# EAGLE board CT_schematic (EAGLE 7.6.0)

Size 100 x 80 mm. Coordinates in mm from the lower left corner, seen from the top.
Outline: 0,0 100,0 100,80 0,80 0,0
Copper layers (1*16): Top 0.035mm / dielectric 1.5mm / Bottom 0.035mm
Design rules "default": minimum track width 10mil, minimum drill 24mil, track to track 8mil, track to pad 8mil, pad to pad 8mil, via to via 8mil, smd to smd 8mil, copper to edge 40mil, drill to drill 8mil, minimum pad ring 10mil, minimum via ring 8mil, stop-mask expansion 4mil, vias tented up to drill 0mil, thermal gap 10mil

## Footprints (pad centres in the part's own frame; a part is rotated, then mirrored left to right if it is on the bottom)
C0603 = smd 0.8 x 0.8: 1 -0.762,0; 2 0.762,0
C0402 = smd 0.5 x 0.5: 1 -0.508,0; 2 0.508,0
C0805 = smd 1.2 x 1.3: 1 -1.016,0; 2 1.016,0
C1210 = smd 1.2 x 2.5: 1 -1.524,0; 2 1.524,0
EXV-9H = smd 3.505 x 1.676: 1 -2.857,0; 2 2.857,0
L0603 = smd 0.8 x 0.8: 1 -0.762,0; 2 0.762,0
PJ-037B_PACKAGE = drill 3.7 square: 1 12,0 | drill 3.2 square: 2 6,0
R0603 = smd 0.8 x 0.8: 1 -0.762,0; 2 0.762,0
LQFP144 = smd 0.35 x 1.35: 1 -8.75,-10.625; 2 -8.25,-10.625; 3 -7.75,-10.625; 4 -7.25,-10.625; 5 -6.75,-10.625; 6 -6.25,-10.625; 7 -5.75,-10.625; 8 -5.25,-10.625; 9 -4.75,-10.625; 10 -4.25,-10.625; 11 -3.75,-10.625; 12 -3.25,-10.625; 13 -2.75,-10.62; 14 -2.25,-10.625; 15 -1.75,-10.625; 16 -1.25,-10.625; 17 -0.75,-10.625; 18 -0.25,-10.625; 19 0.25,-10.625; 20 0.75,-10.625; 21 1.25,-10.625; 22 1.75,-10.625; 23 2.25,-10.625; 24 2.75,-10.62; 25 3.25,-10.625; 26 3.75,-10.625; 27 4.25,-10.625; 28 4.75,-10.625; 29 5.25,-10.625; 30 5.75,-10.625; 31 6.25,-10.625; 32 6.75,-10.625; 33 7.25,-10.625; 34 7.75,-10.625; 35 8.25,-10.625; 36 8.75,-10.625; 73 8.75,10.625; 74 8.25,10.625; 75 7.75,10.625; 76 7.25,10.625; 77 6.75,10.625; 78 6.25,10.625; 79 5.75,10.625; 80 5.25,10.625; 81 4.75,10.625; 82 4.25,10.625; 83 3.75,10.625; 84 3.25,10.625; 85 2.75,10.625; 86 2.25,10.625; 87 1.75,10.625; 88 1.25,10.625; 89 0.75,10.625; 90 0.25,10.625; 91 -0.25,10.625; 92 -0.75,10.625; 93 -1.25,10.625; 94 -1.75,10.625; 95 -2.25,10.625; 96 -2.75,10.625; 97 -3.25,10.625; 98 -3.75,10.625; 99 -4.25,10.625; 100 -4.75,10.625; 101 -5.25,10.625; 102 -5.75,10.625; 103 -6.25,10.625; 104 -6.75,10.625; 105 -7.25,10.625; 106 -7.75,10.625; 107 -8.25,10.625; 108 -8.75,10.625 | smd 1.35 x 0.35: 37 10.625,-8.75; 38 10.625,-8.25; 39 10.625,-7.75; 40 10.625,-7.25; 41 10.625,-6.75; 42 10.625,-6.25; 43 10.625,-5.75; 44 10.625,-5.25; 45 10.625,-4.75; 46 10.625,-4.25; 47 10.625,-3.75; 48 10.625,-3.25; 49 10.625,-2.75; 50 10.625,-2.25; 51 10.625,-1.75; 52 10.625,-1.25; 53 10.625,-0.75; 54 10.625,-0.25; 55 10.625,0.25; 56 10.625,0.75; 57 10.625,1.25; 58 10.625,1.75; 59 10.625,2.25; 60 10.625,2.75; 61 10.625,3.25; 62 10.625,3.75; 63 10.625,4.25; 64 10.625,4.75; 65 10.625,5.25; 66 10.625,5.75; 67 10.625,6.25; 68 10.625,6.75; 69 10.625,7.25; 70 10.625,7.75; 71 10.625,8.25; 72 10.625,8.75; 109 -10.625,8.75; 110 -10.625,8.25; 111 -10.625,7.75; 112 -10.625,7.25; 113 -10.625,6.75; 114 -10.625,6.25; 115 -10.625,5.75; 116 -10.625,5.25; 117 -10.625,4.75; 118 -10.625,4.25; 119 -10.625,3.75; 120 -10.625,3.25; 121 -10.625,2.75; 122 -10.625,2.25; 123 -10.625,1.75; 124 -10.625,1.25; 125 -10.625,0.75; 126 -10.625,0.25; 127 -10.625,-0.25; 128 -10.625,-0.75; 129 -10.625,-1.25; 130 -10.625,-1.75; 131 -10.625,-2.25; 132 -10.625,-2.75; 133 -10.625,-3.25; 134 -10.625,-3.75; 135 -10.625,-4.25; 136 -10.625,-4.75; 137 -10.625,-5.25; 138 -10.625,-5.75; 139 -10.625,-6.25; 140 -10.625,-6.75; 141 -10.625,-7.25; 142 -10.625,-7.75; 143 -10.625,-8.25; 144 -10.625,-8.75
LGA14R35P5X6_200X200X100 = smd 0.35 x 0.15: 1 -0.8,0.525; 2 -0.8,0.175; 3 -0.8,-0.175; 4 -0.8,-0.525; 8 0.8,-0.525; 9 0.8,-0.175; 10 0.8,0.175; 11 0.8,0.525 | smd 0.15 x 0.35: 5 -0.35,-0.8; 6 0,-0.8; 7 0.35,-0.8; 12 0.35,0.8; 13 0,0.8; 14 -0.35,0.8
SSOP-28 = smd 1.5 x 0.4: 1 -3.625,4.225; 2 -3.625,3.575; 3 -3.625,2.925; 4 -3.625,2.275; 5 -3.625,1.625; 6 -3.625,0.975; 7 -3.625,0.325; 8 -3.625,-0.325; 9 -3.625,-0.975; 10 -3.625,-1.625; 11 -3.625,-2.275; 12 -3.625,-2.925; 13 -3.625,-3.575; 14 -3.625,-4.225; 15 3.625,-4.225; 16 3.625,-3.575; 17 3.625,-2.925; 18 3.625,-2.275; 19 3.625,-1.625; 20 3.625,-0.975; 21 3.625,-0.325; 22 3.625,0.325; 23 3.625,0.975; 24 3.625,1.625; 25 3.625,2.275; 26 3.625,2.925; 27 3.625,3.575; 28 3.625,4.225
FCI_10118193-0001LF = smd 0.4 x 1.35: 1 -1.3,2.675; 2 -0.65,2.675; 3 0,2.675; 4 0.65,2.675; 5 1.3,2.675 | smd 1.6 x 1.4: 6 -3.2,2.45; 7 3.2,2.45 | smd 1.9 x 1.9: 8 -1.2,0; 9 1.2,0 | hole 0.5: -3.3,0; 3.3,0
TST-110-05-T-D-RA = drill 1 pad 1.7 square: 1 0,0 | drill 1 pad 1.7: 2 0,2.54; 3 2.54,0; 4 2.54,2.54; 5 5.08,0; 6 5.08,2.54; 7 7.62,0; 8 7.62,2.54; 9 10.16,0; 10 10.16,2.54; 11 12.7,0; 12 12.7,2.54; 13 15.24,0; 14 15.24,2.54; 15 17.78,0; 16 17.78,2.54; 17 20.32,0; 18 20.32,2.54; 19 22.86,0; 20 22.86,2.54
TSSOP20-I = smd 0.4 x 1.35: 1 -2.925,-2.875; 2 -2.275,-2.875; 3 -1.625,-2.875; 4 -0.975,-2.875; 5 -0.325,-2.875; 6 0.325,-2.875; 7 0.975,-2.875; 8 1.625,-2.875; 9 2.275,-2.875; 10 2.925,-2.875; 11 2.925,2.875; 12 2.275,2.875; 13 1.625,2.875; 14 0.975,2.875; 15 0.325,2.875; 16 -0.325,2.875; 17 -0.975,2.875; 18 -1.625,2.875; 19 -2.275,2.875; 20 -2.925,2.875
182-009-MALE = drill 1.194 pad 1.524 octagon: 1 -5.537,10.923; 2 -2.769,10.923; 3 0,10.923; 4 2.769,10.923; 5 5.537,10.923; 6 -4.153,8.08; 7 -1.384,8.08; 8 1.384,8.08; 9 4.153,8.08 | hole 3.048: -12.446,9.501; 12.446,9.501
ABLS-25.000MHZ-B2F-T = smd 5.6 x 2.8: 1 -3.81,0; 2 5.69,0
ASEK = smd 1.4 x 1: 1 -1.1,-0.8; 2 1.1,-0.8; 3 1.1,0.8; 4 -1.1,0.8
ASFL1 = smd 1.7 x 1.5: 1 -1.27,-1.1; 2 1.27,-1.1; 3 1.27,1.1; 4 -1.27,1.1
WSON-8 = smd 0.3 x 0.6: 1 -0.75,0; 2 0.05,0; 3 0.85,0; 4 1.65,0; 5 1.65,3.8; 6 0.85,3.8; 7 0.05,3.8; 8 -0.75,3.8 | smd 3 x 2.6: PAD 0.45,1.9
SON-6 = smd 0.55 x 0.3: 1 -0.355,0.5 | smd 0.52 x 0.3: 2 -0.37,0; 3 -0.37,-0.5; 4 0.37,-0.5; 5 0.37,0; 6 0.37,0.5
SW_4-1437565-2 = smd 1.4 x 2.1: 1 -2.23,4.55; 2 -2.23,-4.55; 3 2.23,4.55; 4 2.23,-4.55
LGM67K-G1J2-24-Z = smd 0.8 x 1.4: A -2,0; C 0,0
NC7SZ125M5X = smd 1.3 x 0.7: 1 -1.3,0.95; 2 -1.3,0; 3 -1.3,-0.95; 4 1.3,-0.95; 5 1.3,0.95

## Placement (x,y rotation side)
C1  1e-06  [C0603]  -26.67,72.39 0 top  (outside the outline)
C2  1e-07  [C0603]  -30.48,72.39 0 top  (outside the outline)
C3  1e-07  [C0603]  -34.29,72.39 0 top  (outside the outline)
C4  1e-07  [C0603]  -38.1,72.39 0 top  (outside the outline)
C5  1e-07  [C0603]  -41.91,72.39 0 top  (outside the outline)
C6  1e-07  [C0603]  -45.72,72.39 0 top  (outside the outline)
C7  1e-07  [C0603]  -49.53,72.39 0 top  (outside the outline)
C8  1e-07  [C0603]  -53.34,72.39 0 top  (outside the outline)
C9  1e-07  [C0603]  -57.15,72.39 0 top  (outside the outline)
C10  1e-07  [C0603]  -60.96,72.39 0 top  (outside the outline)
C11  1e-07  [C0603]  -64.77,72.39 0 top  (outside the outline)
C12  1e-07  [C0603]  -68.58,72.39 0 top  (outside the outline)
C13  1e-07  [C0603]  -72.39,72.39 0 top  (outside the outline)
C14  4.7e-06  [C0603]  -15.24,72.39 0 top  (outside the outline)
C15  2.2e-06  [C0603]  -19.05,72.39 0 top  (outside the outline)
C16  2.2e-06  [C0603]  -22.86,72.39 0 top  (outside the outline)
C17  1e-08  [C0603]  -76.2,72.39 0 top  (outside the outline)
C18  1e-06  [C0603]  -80.01,72.39 0 top  (outside the outline)
C19  1e-11  [C0402]  -49.53,77.47 0 top  (outside the outline)
C20  1e-11  [C0402]  -53.34,77.47 0 top  (outside the outline)
C21  1e-07  [C0402]  -57.15,77.47 0 top  (outside the outline)
C22  1e-07  [C0402]  -60.96,77.47 0 top  (outside the outline)
C23  1e-07  [C0402]  -64.77,77.47 0 top  (outside the outline)
C24  4.7e-06  [C0805]  -27.94,66.04 0 top  (outside the outline)
C25  1e-07  [C0402]  -68.58,77.47 0 top  (outside the outline)
C26  1e-07  [C0402]  -72.39,77.47 0 top  (outside the outline)
C27  1e-07  [C0402]  -76.2,77.47 0 top  (outside the outline)
C28  1e-07  [C0402]  -80.01,77.47 0 top  (outside the outline)
C29  1e-07  [C0402]  -15.24,82.55 0 top  (outside the outline)
C30  1e-07  [C0402]  -19.05,82.55 0 top  (outside the outline)
C31  1e-07  [C0402]  -22.86,82.55 0 top  (outside the outline)
C32  1e-07  [C0402]  -26.67,82.55 0 top  (outside the outline)
C33  1e-07  [C0402]  -30.48,82.55 0 top  (outside the outline)
C34  1e-08  [C0402]  -34.29,82.55 0 top  (outside the outline)
C35  1e-08  [C0402]  -38.1,82.55 0 top  (outside the outline)
C36  1e-08  [C0402]  -41.91,82.55 0 top  (outside the outline)
C37  1e-05  [C1210]  -68.58,59.69 0 top  (outside the outline)
C38  1e-05  [C1210]  -74.93,59.69 0 top  (outside the outline)
C39  1e-07  [C0402]  -45.72,82.55 0 top  (outside the outline)
C40  0.0001  [EXV-9H]  -74.93,52.07 0 top  (outside the outline)
C41  0.0001  [EXV-9H]  -17.78,59.69 0 top  (outside the outline)
C42  1e-08  [C0402]  -49.53,82.55 0 top  (outside the outline)
C43  1e-08  [C0402]  -53.34,82.55 0 top  (outside the outline)
F1  240.0  [L0603]  -15.24,77.47 0 top  (outside the outline)
J1  PJ-037B  [PJ-037B_PACKAGE]  -40.64,30.48 0 top  (outside the outline)
R2  1000.0  [R0603]  -19.05,77.47 0 top  (outside the outline)
R4  4700.0  [R0603]  -22.86,77.47 0 top  (outside the outline)
R5  2200.0  [R0603]  -26.67,77.47 0 top  (outside the outline)
R6  2200.0  [R0603]  -30.48,77.47 0 top  (outside the outline)
R7  10000.0  [R0603]  -48.26,66.04 0 top  (outside the outline)
R8  10000.0  [R0603]  -53.34,66.04 0 top  (outside the outline)
R9  4700.0  [R0603]  -34.29,77.47 0 top  (outside the outline)
R10  10000.0  [R0603]  -58.42,66.04 0 top  (outside the outline)
R11  10000.0  [R0603]  -63.5,66.04 0 top  (outside the outline)
R12  10000.0  [R0603]  -68.58,66.04 0 top  (outside the outline)
R13  100000.0  [R0603]  -33.02,66.04 0 top  (outside the outline)
R14  2231.0  [R0603]  -38.1,77.47 0 top  (outside the outline)
R15  1000.0  [R0603]  -41.91,77.47 0 top  (outside the outline)
R16  10000.0  [R0603]  -73.66,66.04 0 top  (outside the outline)
R17  10000.0  [R0603]  -78.74,66.04 0 top  (outside the outline)
R18  9100.0  [R0603]  -45.72,77.47 0 top  (outside the outline)
R19  680000.0  [R0603]  -38.1,66.04 0 top  (outside the outline)
R20  120000.0  [R0603]  -43.18,66.04 0 top  (outside the outline)
U1  STM32F205ZFT6  [LQFP144]  -24.13,11.43 0 top  (outside the outline)
U2  BMC150  [LGA14R35P5X6_200X200X100]  -63.5,59.69 0 top  (outside the outline)
U3  FT232RL-REEL  [SSOP-28]  -20.32,30.48 0 top  (outside the outline)
U4  10118193-0001LF  [FCI_10118193-0001LF]  -55.88,41.91 0 top  (outside the outline)
U5  TST-110-05-T-D-RA  [TST-110-05-T-D-RA]  -46.99,49.53 0 top  (outside the outline)
U6  SP3203ECY-L/TR  [TSSOP20-I]  -72.39,29.21 0 top  (outside the outline)
U7  182-009-113R531  [182-009-MALE]  -59.69,6.35 0 top  (outside the outline)
U8  ABLS-25.000MHZ-B2F-T  [ABLS-25.000MHZ-B2F-T]  -36.83,59.69 0 top  (outside the outline)
U9  ASEK-32.768KHz-ECST  [ASEK]  -66.04,52.07 0 top  (outside the outline)
U10  ASFL1-12MHZ-NCS  [ASFL1]  -46.99,43.18 0 top  (outside the outline)
U11  LP3878SDX-ADJ/NOPB  [WSON-8]  -30.48,40.64 0 top  (outside the outline)
U12  TPS3895ADRYR  [SON-6]  -55.88,81.28 0 top  (outside the outline)
U13  4-1437565-2  [SW_4-1437565-2]  -57.15,29.21 0 top  (outside the outline)
U14  Q65110A2395  [LGM67K-G1J2-24-Z]  -48.26,59.69 0 top  (outside the outline)
U15  nc7sz125m5x  [NC7SZ125M5X]  -15.24,66.04 0 top  (outside the outline)
U16  nc7sz125m5x  [NC7SZ125M5X]  -21.59,66.04 0 top  (outside the outline)

## Library data of the parts
C1-C43 F1 J1 R2 R4-R20 U1-U16 = circuit_tree

## Nets
CLK_CRYSTAL_U1_23: C19.1 U1.23 U8.1
CLK_CRYSTAL_U1_24: C20.1 U1.24 U8.2
CLK_U1_8: U1.8 U9.3
CLK_U3_27: U3.27 U10.3
GND: C1.2 C2.2 C3.2 C4.2 C5.2 C6.2 C7.2 C8.2 C9.2 C10.2 C11.2 C12.2 C13.2 C14.2 C15.2 C16.2 C17.2 C18.2 C19.2 C20.2 C21.2 C22.2 C23.2 C24.2 C25.2 C26.2 C27.2 C28.2 C29.2 C32.2 C33.2 C34.2 C35.2 C36.2 C37.2 C38.2 C39.2 C40.2 C41.2 C42.2 C43.2 J1.2 R2.2 R7.2 R11.2 R15.2 R18.2 R20.2 U1.16 U1.31 U1.38 U1.51 U1.61 U1.83 U1.94 U1.107 U1.120 U1.130 U2.1 U2.6 U2.7 U2.9 U3.7 U3.18 U3.21 U3.25 U3.26 U4.5 U4.6 U4.7 U4.8 U4.9 U5.4 U5.6 U5.8 U5.10 U5.12 U5.14 U5.16 U5.18 U5.20 U6.18 U7.5 U9.2 U10.2 U11.3 U11.PAD U12.2 U14.C U15.2 U15.3 U16.1 U16.3
NET_U1_25: R4.1 U1.25 U16.4
NET_U1_33: C17.1 C18.1 F1.1 U1.32 U1.33
NET_U1_71: C15.1 U1.71
NET_U1_106: C16.1 U1.106
NET_U1_136: R5.1 U1.136 U2.11
NET_U1_137: R6.1 U1.137 U2.14
NET_U1_138: R7.1 U1.138
NET_U1_141: U14.A
NET_U1_142: U13.3 U13.4
NET_U3_14: R10.1 U3.14
NET_U3_17: C25.1 U3.17
NET_U3_19: R11.1 U3.19
NET_U4_1: R9.1 U4.1
NET_U4_2: U3.16 U4.2
NET_U4_3: U3.15 U4.3
NET_U4_19: R9.2
NET_U6_1: C30.1 U6.1
NET_U6_2: C32.1 U6.2
NET_U6_3: C30.2 U6.3
NET_U6_4: C31.1 U6.4
NET_U6_5: C31.2 U6.5
NET_U6_6: C33.1 U6.6
NET_U6_20: U6.20
NET_U7_2: U6.14 U7.2
NET_U7_3: U6.17 U7.3
NET_U7_7: U6.13 U7.7
NET_U7_8: U6.16 U7.8
NET_U11_1: C36.1 U11.1
NET_U11_6: R14.2 R15.1 U11.6
NET_U11_8: R13.1 U11.8
NET_U12_1: R17.1 R18.1 U12.1
NET_U12_3: R19.2 R20.1 U12.3
NET_U12_4: R16.1 U12.4 U15.4 U16.2
NET_U13_1: R2.1 U13.1 U13.2
PROC_SYS_JTCK_SWCLK: U1.109 U5.9
PROC_SYS_JTDO_SWO: U1.133 U5.13
PROC_SYS_JTMS_SWDIO: U1.105 U5.7
PROC_UART4_RX: U1.35 U3.1
PROC_UART4_TX: U1.34 U3.5
PROC_UART5_RX: U1.116 U6.11
PROC_UART5_TX: U1.113 U6.7
RST_OUT_U5_SRESET_B: R12.1 U5.15 U15.1
VCC_S1_13V8: C37.1 C40.1 C41.1 J1.1 R13.2 U11.4
VCC_TIER1_3V3: C1.1 C2.1 C3.1 C4.1 C5.1 C6.1 C7.1 C8.1 C9.1 C10.1 C11.1 C12.1 C13.1 C14.1 C21.1 C22.1 C23.1 C24.1 C26.1 C27.1 C28.1 C29.1 C34.1 C35.1 C38.1 C39.1 C42.1 C43.1 F1.2 R4.2 R5.2 R6.2 R8.1 R8.2 R10.2 R12.2 R14.1 R16.2 R17.2 R19.1 U1.6 U1.17 U1.30 U1.39 U1.52 U1.62 U1.72 U1.84 U1.95 U1.108 U1.121 U1.131 U1.144 U2.8 U2.10 U2.12 U2.13 U3.4 U3.20 U5.1 U6.12 U6.19 U9.4 U10.4 U11.5 U12.6 U15.5 U16.5

## Tracks (layer width: path | path; a pad name or v marks a point on that pad's centre or on a via)
CLK_CRYSTAL_U1_23  (2 unrouted)
CLK_CRYSTAL_U1_24  (2 unrouted)
CLK_U1_8  (1 unrouted)
CLK_U3_27  (1 unrouted)
GND  (92 unrouted)
NET_U1_25  (2 unrouted)
NET_U1_33  (4 unrouted)
NET_U1_71  (1 unrouted)
NET_U1_106  (1 unrouted)
NET_U1_136  (2 unrouted)
NET_U1_137  (2 unrouted)
NET_U1_138  (1 unrouted)
NET_U1_142  (1 unrouted)
NET_U3_14  (1 unrouted)
NET_U3_17  (1 unrouted)
NET_U3_19  (1 unrouted)
NET_U4_1  (1 unrouted)
NET_U4_2  (1 unrouted)
NET_U4_3  (1 unrouted)
NET_U6_1  (1 unrouted)
NET_U6_2  (1 unrouted)
NET_U6_3  (1 unrouted)
NET_U6_4  (1 unrouted)
NET_U6_5  (1 unrouted)
NET_U6_6  (1 unrouted)
NET_U7_2  (1 unrouted)
NET_U7_3  (1 unrouted)
NET_U7_7  (1 unrouted)
NET_U7_8  (1 unrouted)
NET_U11_1  (1 unrouted)
NET_U11_6  (2 unrouted)
NET_U11_8  (1 unrouted)
NET_U12_1  (2 unrouted)
NET_U12_3  (2 unrouted)
NET_U12_4  (3 unrouted)
NET_U13_1  (2 unrouted)
PROC_SYS_JTCK_SWCLK  (1 unrouted)
PROC_SYS_JTDO_SWO  (1 unrouted)
PROC_SYS_JTMS_SWDIO  (1 unrouted)
PROC_UART4_RX  (1 unrouted)
PROC_UART4_TX  (1 unrouted)
PROC_UART5_RX  (1 unrouted)
PROC_UART5_TX  (1 unrouted)
RST_OUT_U5_SRESET_B  (2 unrouted)
VCC_S1_13V8  (5 unrouted)
VCC_TIER1_3V3  (67 unrouted)